# Altium PCB CC_SoC Debugger Ver1.02.PcbDoc (part 2 of 2)
Units mil, origin at the board's own origin, x right, y up, seen from the top; angles counter-clockwise.
Board outline 3750.19 x 1742.31 mil, 3 copper layers (TopLayer, MidLayer24, BottomLayer); 42 components, 43 nets, 177 pads, 79 vias.
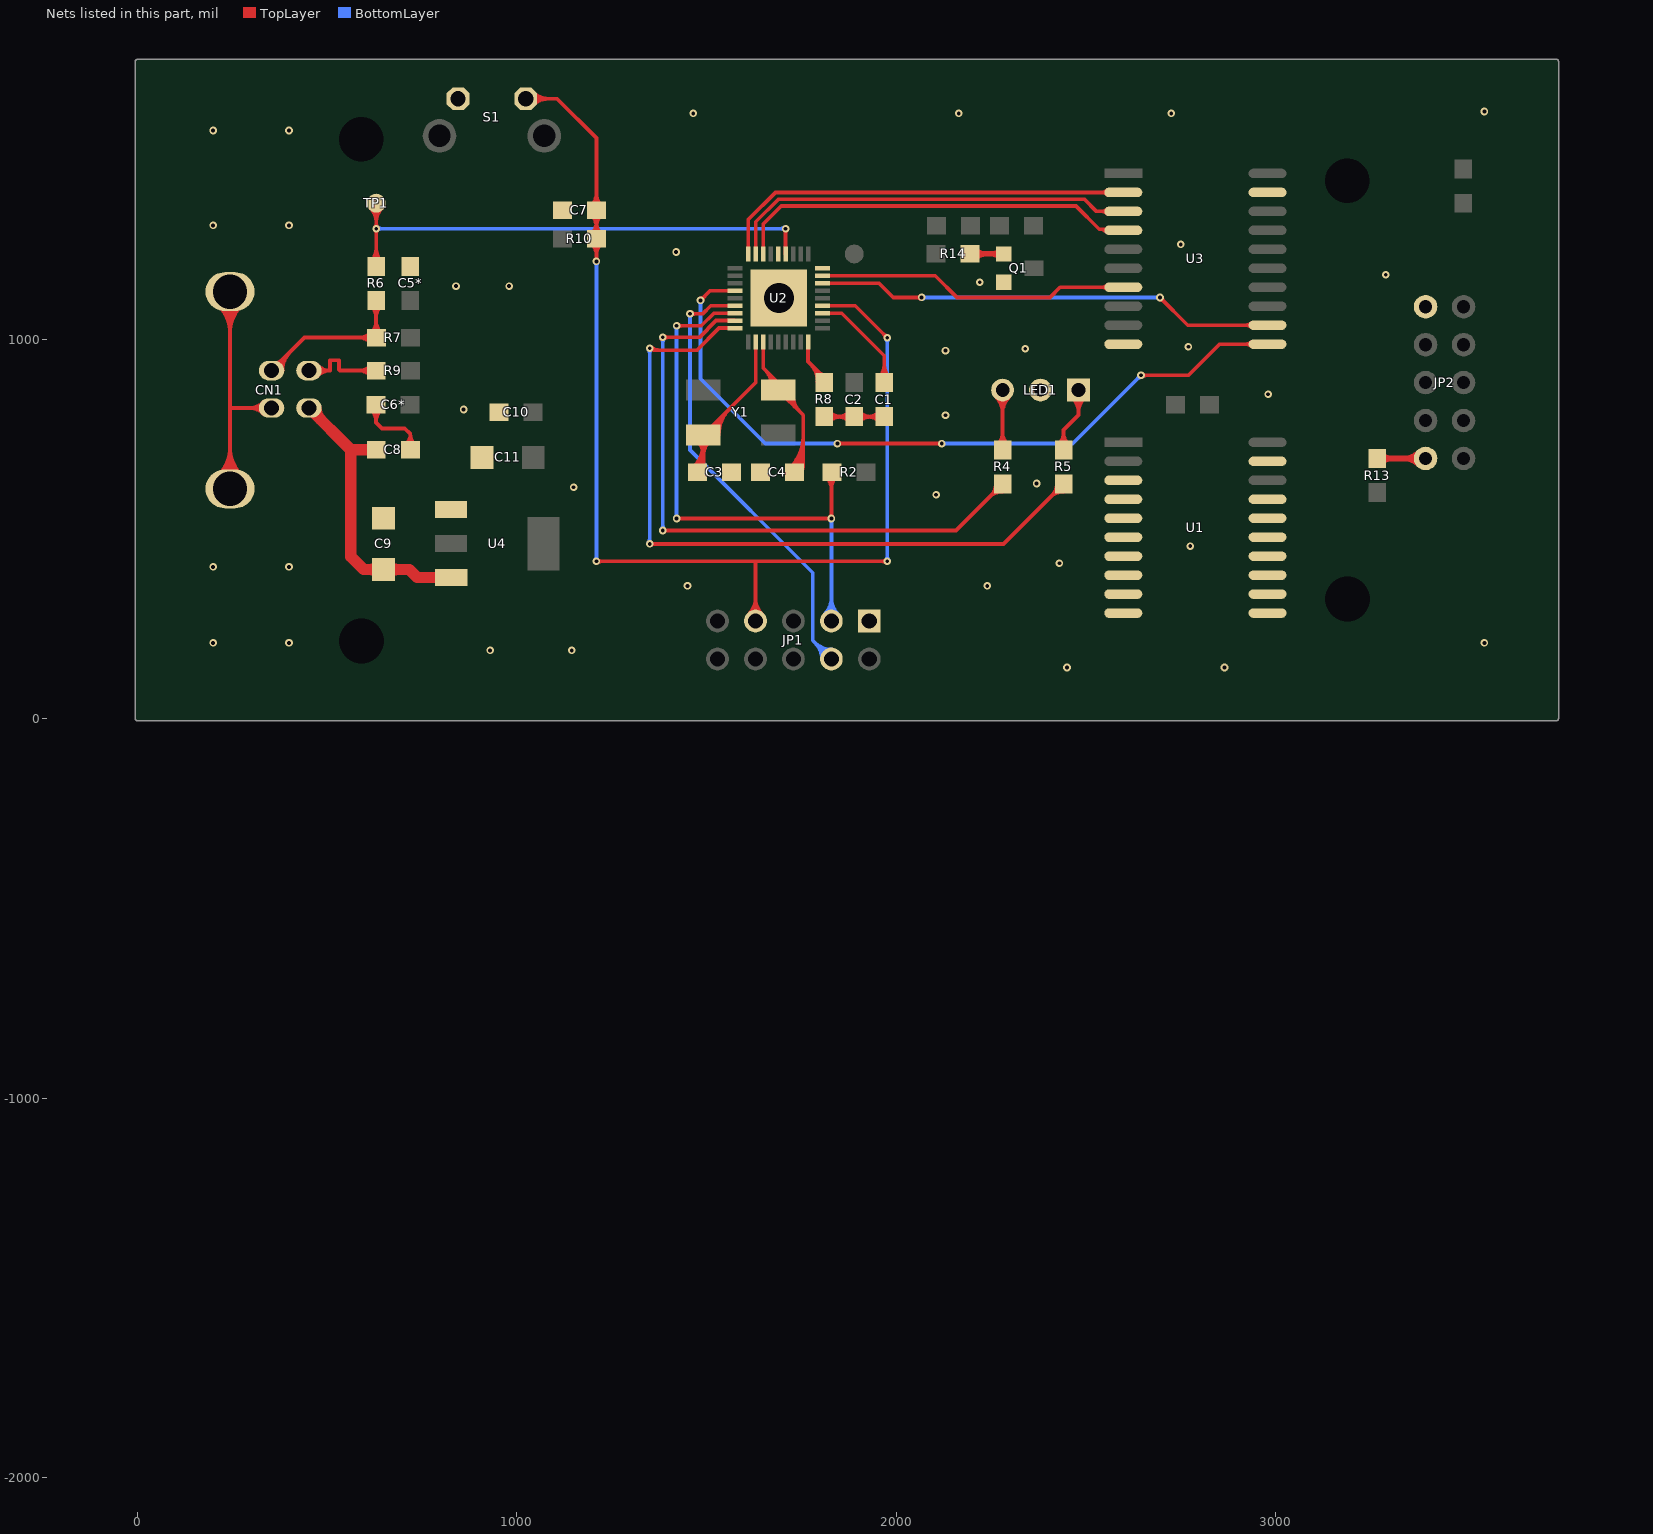
[diagram p2: the nets of this part, all layers, seen from the top]

## Via types
v1: diameter 20, hole 10, TopLayer to BottomLayer, 79 vias

## Nets (pads, with @x,y where several pads share a name; then routed paths per layer and width w, separated by ;. In a path a pad name is that pad's centre, name@x,y a point inside that pad or via, vN(x,y) a via of type N, cw(c..) or ccw(c..) an arc to the next point about the centre after c; other vN are vias at no path point) (continued)
GND: C1.2 C2.2 C3.2 C4.2 C5*.2 C6*.2 C7.2 C8.2 C9.2 C10.2 C11.2 CN1.SH1 CN1.SH2 CN1.VSS JP1.1 JP2.1 LED1.2 Q1.2 R8.1 S1.2 U1.3 U1.4 U1.5 U1.6 U1.7 U1.8 U1.9 U1.10 U1.11 U1.12 U1.13 U1.14 U1.15 U1.16 U1.17 U1.19 U2.37 U3.10 U3.19 U4.1 | length 5801.1
  TopLayer w10: CN1.SH2@244.63,605.85 244.63,822.83 ; CN1.SH1@244.63,1125.54 244.63,822.83 ; CN1.VSS@354.1,818.89 248.57,818.89 244.63,822.83 ; C6*.2@629.53,826.77 629.53,780.47 645,765 705,765 719.76,750.24 ; C8.2@719.76,708.66 719.76,750.24 ; R8.1@1811.02,796.38 1811.42,795.98 C2.2@1889.76,795.98 C1.2@1968.5,795.98 ; CN1.SH2@211.97,638.51 ccw(c133.14,717.34) 244.63,717.34 ; CN1.SH2@211.97,638.51 ccw(c133.14,717.34) 244.63,717.34 ; CN1.SH2@211.97,638.51 ccw(c133.14,717.34) 244.63,717.34 ; CN1.SH2@211.97,638.51 ccw(c133.14,717.34) 244.63,717.34 ; CN1.SH1@211.97,1092.88 cw(c133.14,1014.05) 244.63,1014.05 ; CN1.SH1@211.97,1092.88 cw(c133.14,1014.05) 244.63,1014.05 ; CN1.SH1@211.97,1092.88 cw(c133.14,1014.05) 244.63,1014.05 ; CN1.SH1@211.97,1092.88 cw(c133.14,1014.05) 244.63,1014.05 ; CN1.SH2@219.04,631.44 ccw(c157.28,693.2) 244.63,693.2 ; CN1.SH2@219.04,631.44 ccw(c157.28,693.2) 244.63,693.2 ; CN1.SH2@219.04,631.44 ccw(c157.28,693.2) 244.63,693.2 ; CN1.SH2@219.04,631.44 ccw(c157.28,693.2) 244.63,693.2 ; CN1.SH1@219.04,1099.95 cw(c157.28,1038.19) 244.63,1038.19 ; CN1.SH1@219.04,1099.95 cw(c157.28,1038.19) 244.63,1038.19 ; CN1.SH1@219.04,1099.95 cw(c157.28,1038.19) 244.63,1038.19 ; CN1.SH1@219.04,1099.95 cw(c157.28,1038.19) 244.63,1038.19 ; CN1.SH2@226.11,624.37 ccw(c181.42,669.06) 244.63,669.06 ; CN1.SH2@226.11,624.37 ccw(c181.42,669.06) 244.63,669.06 ; CN1.SH2@226.11,624.37 ccw(c181.42,669.06) 244.63,669.06 ; CN1.SH2@226.11,624.37 ccw(c181.42,669.06) 244.63,669.06 ; CN1.SH1@226.11,1107.02 cw(c181.42,1062.33) 244.63,1062.33 ; CN1.SH1@226.11,1107.02 cw(c181.42,1062.33) 244.63,1062.33 ; CN1.SH1@226.11,1107.02 cw(c181.42,1062.33) 244.63,1062.33 ; CN1.SH1@226.11,1107.02 cw(c181.42,1062.33) 244.63,1062.33 ; 244.63,669.06 ccw(c307.83,669.06) CN1.SH2@263.14,624.37 ; 244.63,669.06 ccw(c307.83,669.06) CN1.SH2@263.14,624.37 ; 244.63,669.06 ccw(c307.83,669.06) CN1.SH2@263.14,624.37 ; 244.63,669.06 ccw(c307.83,669.06) CN1.SH2@263.14,624.37 ; 244.63,693.2 ccw(c331.97,693.2) CN1.SH2@270.21,631.44 ; 244.63,693.2 ccw(c331.97,693.2) CN1.SH2@270.21,631.44 ; 244.63,693.2 ccw(c331.97,693.2) CN1.SH2@270.21,631.44 ; 244.63,693.2 ccw(c331.97,693.2) CN1.SH2@270.21,631.44 ; 244.63,717.34 ccw(c356.12,717.34) CN1.SH2@277.28,638.51 ; 244.63,717.34 ccw(c356.12,717.34) CN1.SH2@277.28,638.51 ; 244.63,717.34 ccw(c356.12,717.34) CN1.SH2@277.28,638.51 ; 244.63,717.34 ccw(c356.12,717.34) CN1.SH2@277.28,638.51 ; 244.63,1014.05 cw(c356.12,1014.05) CN1.SH1@277.28,1092.88 ; 244.63,1014.05 cw(c356.12,1014.05) CN1.SH1@277.28,1092.88 ; 244.63,1014.05 cw(c356.12,1014.05) CN1.SH1@277.28,1092.88 ; 244.63,1014.05 cw(c356.12,1014.05) CN1.SH1@277.28,1092.88 ; 244.63,1038.19 cw(c331.97,1038.19) CN1.SH1@270.21,1099.95 ; 244.63,1038.19 cw(c331.97,1038.19) CN1.SH1@270.21,1099.95 ; 244.63,1038.19 cw(c331.97,1038.19) CN1.SH1@270.21,1099.95 ; 244.63,1038.19 cw(c331.97,1038.19) CN1.SH1@270.21,1099.95 ; 244.63,1062.33 cw(c307.83,1062.33) CN1.SH1@263.14,1107.02 ; 244.63,1062.33 cw(c307.83,1062.33) CN1.SH1@263.14,1107.02 ; 244.63,1062.33 cw(c307.83,1062.33) CN1.SH1@263.14,1107.02 ; 244.63,1062.33 cw(c307.83,1062.33) CN1.SH1@263.14,1107.02 ; 296.52,818.89 cw(c296.52,769.18) CN1.VSS@331.67,804.33 ; 296.52,818.89 ccw(c296.52,868.6) CN1.VSS@331.67,833.45 ; 296.52,818.89 cw(c296.52,769.18) CN1.VSS@331.67,804.33 ; 296.52,818.89 ccw(c296.52,868.6) CN1.VSS@331.67,833.45 ; 296.52,818.89 cw(c296.52,769.18) CN1.VSS@331.67,804.33 ; 296.52,818.89 ccw(c296.52,868.6) CN1.VSS@331.67,833.45 ; 296.52,818.89 cw(c296.52,769.18) CN1.VSS@331.67,804.33 ; 296.52,818.89 ccw(c296.52,868.6) CN1.VSS@331.67,833.45 ; C6*.2@616.78,814.02 cw(c586,783.24) 629.53,783.24 ; C6*.2@616.78,814.02 cw(c586,783.24) 629.53,783.24 ; C6*.2@616.78,814.02 cw(c586,783.24) 629.53,783.24 ; 629.53,783.24 cw(c673.06,783.24) C6*.2@642.28,814.02 ; 629.53,783.24 cw(c673.06,783.24) C6*.2@642.28,814.02 ; 629.53,783.24 cw(c673.06,783.24) C6*.2@642.28,814.02 ; C8.2@707.44,721.83 ccw(c680.86,750.23) 719.76,750.23 ; C8.2@707.44,721.83 ccw(c680.86,750.23) 719.76,750.23 ; C8.2@707.44,721.83 ccw(c680.86,750.23) 719.76,750.23 ; 719.76,750.23 ccw(c758.67,750.23) C8.2@732.09,721.83 ; 719.76,750.23 ccw(c758.67,750.23) C8.2@732.09,721.83 ; 719.76,750.23 ccw(c758.67,750.23) C8.2@732.09,721.83 ; R8.1@1823.77,783.63 cw(c1853.6,753.8) 1853.6,795.98 ; R8.1@1823.77,783.63 cw(c1853.6,753.8) 1853.6,795.98 ; R8.1@1823.77,783.63 cw(c1853.6,753.8) 1853.6,795.98 ; R8.1@1823.77,809.13 ccw(c1855.51,840.86) 1855.51,795.98 ; R8.1@1823.77,809.13 ccw(c1855.51,840.86) 1855.51,795.98 ; R8.1@1823.77,809.13 ccw(c1855.51,840.86) 1855.51,795.98 ; 1846.23,795.98 cw(c1846.23,752.45) C2.2@1877.01,783.23 ; 1846.23,795.98 ccw(c1846.23,839.52) C2.2@1877.01,808.73 ; 1846.23,795.98 cw(c1846.23,752.45) C2.2@1877.01,783.23 ; 1846.23,795.98 ccw(c1846.23,839.52) C2.2@1877.01,808.73 ; 1846.23,795.98 cw(c1846.23,752.45) C2.2@1877.01,783.23 ; 1846.23,795.98 ccw(c1846.23,839.52) C2.2@1877.01,808.73 ; C2.2@1902.51,783.23 cw(c1933.3,752.45) 1933.3,795.98 ; C2.2@1902.51,783.23 cw(c1933.3,752.45) 1933.3,795.98 ; C2.2@1902.51,783.23 cw(c1933.3,752.45) 1933.3,795.98 ; C2.2@1902.51,808.73 ccw(c1933.29,839.51) 1933.29,795.98 ; C2.2@1902.51,808.73 ccw(c1933.29,839.51) 1933.29,795.98 ; C2.2@1902.51,808.73 ccw(c1933.29,839.51) 1933.29,795.98 ; 1924.97,795.98 cw(c1924.97,752.45) C1.2@1955.75,783.23 ; 1924.97,795.98 ccw(c1924.97,839.52) C1.2@1955.75,808.73 ; 1924.97,795.98 cw(c1924.97,752.45) C1.2@1955.75,783.23 ; 1924.97,795.98 ccw(c1924.97,839.52) C1.2@1955.75,808.73 ; 1924.97,795.98 cw(c1924.97,752.45) C1.2@1955.75,783.23 ; 1924.97,795.98 ccw(c1924.97,839.52) C1.2@1955.75,808.73
  other v1: 2450,135 2865,135 930,180 1145,180 200,200 400,200 3550,200 1450,350 2240,350 200,400 400,400 2430,410 2775,455 2105,590 1150,610 2370,620 2130,800 860,815 2980,855 2130,970 2340,975 2770,980 840,1140 980,1140 2220,1150 3290,1170 1420,1230 2750,1250 200,1300 400,1300 200,1550 400,1550 1465,1595 2165,1595 2725,1595 3550,1600
LED_GREEN: R5.2 U2.18 | length 2357.4
  TopLayer w10: v1(1350.39,460.63) 2282.76,460.63 R5.2@2440.94,618.82 ; 1360.76,971 1474.94,971 1533.27,1029.33 U2.18@1574.72,1029.33 ; v1@1353.93,457.09 cw(c1362.46,448.56) 1362.46,460.63 ; v1@1353.93,457.09 cw(c1362.46,448.56) 1362.46,460.63 ; v1@1353.93,457.09 cw(c1362.46,448.56) 1362.46,460.63 ; v1@1353.93,464.17 ccw(c1362.46,472.7) 1362.46,460.63 ; v1@1353.93,464.17 ccw(c1362.46,472.7) 1362.46,460.63 ; v1@1353.93,464.17 ccw(c1362.46,472.7) 1362.46,460.63 ; v1@1353.93,979.91 ccw(c1375.45,1001.43) 1375.45,971 ; v1@1353.93,979.91 ccw(c1375.45,1001.43) 1375.45,971 ; v1@1353.93,979.91 ccw(c1375.45,1001.43) 1375.45,971 ; 2406.8,584.68 cw(c2440.94,550.53) R5.2@2440.94,598.82 ; 2406.8,584.68 cw(c2440.94,550.53) R5.2@2440.94,598.82 ; 2406.8,584.68 cw(c2440.94,550.53) R5.2@2440.94,598.82 ; 2411.56,589.43 ccw(c2384.13,616.85) R5.2@2422.91,616.85 ; 2411.56,589.43 ccw(c2384.13,616.85) R5.2@2422.91,616.85 ; 2411.56,589.43 ccw(c2384.13,616.85) R5.2@2422.91,616.85
  BottomLayer w10: v1(1350.39,460.63) v1(1350.39,976.38) ; v1@1346.86,464.17 ccw(c1338.32,472.7) 1350.39,472.7 ; v1@1346.86,464.17 ccw(c1338.32,472.7) 1350.39,472.7 ; v1@1346.86,464.17 ccw(c1338.32,472.7) 1350.39,472.7 ; v1@1346.86,972.84 cw(c1338.32,964.31) 1350.39,964.31 ; v1@1346.86,972.84 cw(c1338.32,964.31) 1350.39,964.31 ; v1@1346.86,972.84 cw(c1338.32,964.31) 1350.39,964.31 ; 1350.39,472.7 ccw(c1362.46,472.7) v1@1353.93,464.17 ; 1350.39,472.7 ccw(c1362.46,472.7) v1@1353.93,464.17 ; 1350.39,472.7 ccw(c1362.46,472.7) v1@1353.93,464.17 ; 1350.39,964.31 cw(c1362.46,964.31) v1@1353.93,972.84 ; 1350.39,964.31 cw(c1362.46,964.31) v1@1353.93,972.84 ; 1350.39,964.31 cw(c1362.46,964.31) v1@1353.93,972.84
LED_RED: R4.2 U2.17 | length 1968.2
  TopLayer w10: v1@1381.89,1000 v1@1385,1000 ; v1(1385,496.06) 2157.56,496.06 R4.2@2280.32,618.82 ; v1(1385,1005) 1481.38,1005 1525.39,1049.02 U2.17@1574.72,1049.02 ; 2246.17,584.68 cw(c2280.32,550.53) R4.2@2280.32,598.82 ; 2250.93,589.43 ccw(c2223.5,616.85) R4.2@2262.28,616.85 ; R4.2@2281.89,617.24 R4.2@2283.46,618.82 ; v1@1388.54,492.53 cw(c1397.07,483.99) 1397.07,496.06 ; v1@1388.54,492.53 cw(c1397.07,483.99) 1397.07,496.06 ; v1@1388.54,492.53 cw(c1397.07,483.99) 1397.07,496.06 ; v1@1388.54,499.6 ccw(c1397.07,508.13) 1397.07,496.06 ; v1@1388.54,499.6 ccw(c1397.07,508.13) 1397.07,496.06 ; v1@1388.54,499.6 ccw(c1397.07,508.13) 1397.07,496.06 ; v1@1388.54,1001.46 cw(c1397.07,992.93) 1397.07,1005 ; v1@1388.54,1001.46 cw(c1397.07,992.93) 1397.07,1005 ; v1@1388.54,1001.46 cw(c1397.07,992.93) 1397.07,1005 ; v1@1388.54,1008.54 ccw(c1397.07,1017.07) 1397.07,1005 ; v1@1388.54,1008.54 ccw(c1397.07,1017.07) 1397.07,1005 ; v1@1388.54,1008.54 ccw(c1397.07,1017.07) 1397.07,1005
  BottomLayer w10: v1@1385,492.13 v1(1385,496.06) v1(1385,1005) ; v1@1381.46,499.6 ccw(c1372.93,508.13) 1385,508.13 ; v1@1381.46,499.6 ccw(c1372.93,508.13) 1385,508.13 ; v1@1381.46,499.6 ccw(c1372.93,508.13) 1385,508.13 ; v1@1381.46,1001.46 cw(c1372.93,992.93) 1385,992.93 ; v1@1381.46,1001.46 cw(c1372.93,992.93) 1385,992.93 ; v1@1381.46,1001.46 cw(c1372.93,992.93) 1385,992.93 ; 1385,508.13 ccw(c1397.07,508.13) v1@1388.54,499.6 ; 1385,508.13 ccw(c1397.07,508.13) v1@1388.54,499.6 ; 1385,508.13 ccw(c1397.07,508.13) v1@1388.54,499.6 ; 1385,992.93 cw(c1397.07,992.93) v1@1388.54,1001.46 ; 1385,992.93 cw(c1397.07,992.93) v1@1388.54,1001.46 ; 1385,992.93 cw(c1397.07,992.93) v1@1388.54,1001.46
NetC1_1: C1.1 U2.30 | length 485.1
  TopLayer w10: U2.30@1805.72,1068.7 1856.3,1068.7 1968.5,956.5 C1.1@1968.5,885.83 ; C1.1@1955.75,900.55 ccw(c1924.97,931.33) 1968.5,931.33 ; C1.1@1955.75,900.55 ccw(c1924.97,931.33) 1968.5,931.33 ; C1.1@1955.75,900.55 ccw(c1924.97,931.33) 1968.5,931.33 ; 1968.5,931.33 ccw(c2012.04,931.33) C1.1@1981.25,900.55 ; 1968.5,931.33 ccw(c2012.04,931.33) C1.1@1981.25,900.55 ; 1968.5,931.33 ccw(c2012.04,931.33) C1.1@1981.25,900.55
NetC3_1: C3.1 U2.20 Y1.1 | length 1793
  TopLayer w10: C3.1@1476.38,653.54 C3.1@1476.38,649.61 1492,665.23 Y1.1@1492,748.03 1629.92,885.95 U2.20@1629.92,992.33 ; C3.1@1465.6,662.36 ccw(c1401.85,726.1) Y1.1@1492,726.1 ; C3.1@1465.6,662.36 ccw(c1401.85,726.1) Y1.1@1492,726.1 ; C3.1@1465.6,662.36 ccw(c1401.85,726.1) Y1.1@1492,726.1 ; C3.1@1472.67,655.29 ccw(c1425.99,701.96) 1492,701.96 ; C3.1@1472.67,655.29 ccw(c1425.99,701.96) 1492,701.96 ; C3.1@1472.67,655.29 ccw(c1425.99,701.96) 1492,701.96 ; Y1.1@1476.05,732.08 cw(c1437.54,693.57) 1492,693.57 ; Y1.1@1476.05,732.08 cw(c1437.54,693.57) 1492,693.57 ; Y1.1@1476.05,732.08 cw(c1437.54,693.57) 1492,693.57 ; C3.1@1479.74,648.21 ccw(c1450.14,677.82) 1492,677.82 ; C3.1@1479.74,648.21 ccw(c1450.14,677.82) 1492,677.82 ; C3.1@1479.74,648.21 ccw(c1450.14,677.82) 1492,677.82 ; Y1.1@1483.12,739.15 cw(c1461.68,717.71) 1492,717.71 ; Y1.1@1483.12,739.15 cw(c1461.68,717.71) 1492,717.71 ; Y1.1@1483.12,739.15 cw(c1461.68,717.71) 1492,717.71 ; 1492,693.57 cw(c1546.46,693.57) Y1.1@1507.95,732.08 ; 1492,693.57 cw(c1546.46,693.57) Y1.1@1507.95,732.08 ; 1492,693.57 cw(c1546.46,693.57) Y1.1@1507.95,732.08 ; 1492,717.71 cw(c1522.32,717.71) Y1.1@1500.88,739.15 ; 1492,717.71 cw(c1522.32,717.71) Y1.1@1500.88,739.15 ; 1492,717.71 cw(c1522.32,717.71) Y1.1@1500.88,739.15 ; Y1.1@1512.28,748.03 cw(c1561.22,748.03) 1526.61,782.64 ; Y1.1@1512.28,748.03 cw(c1561.22,748.03) 1526.61,782.64 ; Y1.1@1512.28,748.03 cw(c1561.22,748.03) 1526.61,782.64 ; Y1.1@1522.28,748.03 cw(c1595.37,748.03) 1543.68,799.71 ; Y1.1@1522.28,748.03 cw(c1595.37,748.03) 1543.68,799.71 ; Y1.1@1522.28,748.03 cw(c1595.37,748.03) 1543.68,799.71 ; Y1.1@1532.28,748.03 cw(c1629.51,748.03) 1560.75,816.79 ; Y1.1@1532.28,748.03 cw(c1629.51,748.03) 1560.75,816.79 ; Y1.1@1532.28,748.03 cw(c1629.51,748.03) 1560.75,816.79
NetC4_1: C4.1 U2.21 Y1.3 | length 1815.5
  TopLayer w10: U2.21@1649.61,992.33 1649.61,924.24 1688.85,885 Y1.3@1688.85,866.14 1755,799.99 1755,672.32 C4.1@1732.28,649.61 ; Y1.3@1709.09,865.73 ccw(c1742.38,860.31) 1718.53,836.46 ; Y1.3@1709.09,865.73 ccw(c1742.38,860.31) 1718.53,836.46 ; Y1.3@1709.09,865.73 ccw(c1742.38,860.31) 1718.53,836.46 ; Y1.3@1718.96,864.12 ccw(c1766.12,856.44) 1732.34,822.66 ; Y1.3@1718.96,864.12 ccw(c1766.12,856.44) 1732.34,822.66 ; Y1.3@1718.96,864.12 ccw(c1766.12,856.44) 1732.34,822.66 ; C4.1@1721.5,662.36 ccw(c1640.63,743.23) 1755,743.23 ; C4.1@1721.5,662.36 ccw(c1640.63,743.23) 1755,743.23 ; C4.1@1721.5,662.36 ccw(c1640.63,743.23) 1755,743.23 ; C4.1@1728.57,655.29 ccw(c1664.77,719.09) 1755,719.09 ; C4.1@1728.57,655.29 ccw(c1664.77,719.09) 1755,719.09 ; C4.1@1728.57,655.29 ccw(c1664.77,719.09) 1755,719.09 ; Y1.3@1728.83,862.52 ccw(c1789.87,852.58) 1746.14,808.85 ; Y1.3@1728.83,862.52 ccw(c1789.87,852.58) 1746.14,808.85 ; Y1.3@1728.83,862.52 ccw(c1789.87,852.58) 1746.14,808.85 ; C4.1@1735.64,648.21 ccw(c1688.91,694.94) 1755,694.94 ; C4.1@1735.64,648.21 ccw(c1688.91,694.94) 1755,694.94 ; C4.1@1735.64,648.21 ccw(c1688.91,694.94) 1755,694.94 ; C4.1@1742.72,641.14 ccw(c1713.06,670.8) C4.1@1755,670.8 ; C4.1@1742.72,641.14 ccw(c1713.06,670.8) C4.1@1755,670.8 ; C4.1@1742.72,641.14 ccw(c1713.06,670.8) C4.1@1755,670.8 ; 1655.32,918.53 cw(c1618.15,881.36) 1668.67,866.85 ccw(c1618.15,881.36) 1655.32,918.53 ; 1667.32,906.53 cw(c1636.79,876) 1678.29,864.09 ccw(c1636.79,876) 1667.32,906.53 ; 1679.32,894.53 cw(c1655.43,870.65) 1687.9,861.33 ccw(c1655.43,870.65) 1679.32,894.53
NetCN1_D+: CN1.D+ R6.1 R7.1 | length 1546.5
  TopLayer w10: CN1.D+@354.1,917.32 441.04,1004.25 R7.1@630.01,1004.25 629.61,1004.65 R6.1@629.61,1102.45 ; CN1.D+@361.98,937.91 ccw(c361.98,968.61) 383.69,946.9 ; CN1.D+@361.98,937.91 ccw(c361.98,968.61) 383.69,946.9 ; CN1.D+@361.98,937.91 ccw(c361.98,968.61) 383.69,946.9 ; CN1.D+@361.98,937.91 ccw(c361.98,968.61) 383.69,946.9 ; CN1.D+@372.57,917.32 cw(c417.14,917.32) 385.62,948.84 ; CN1.D+@372.57,917.32 cw(c417.14,917.32) 385.62,948.84 ; CN1.D+@372.57,917.32 cw(c417.14,917.32) 385.62,948.84 ; CN1.D+@372.57,917.32 cw(c417.14,917.32) 385.62,948.84 ; CN1.D+@382.57,917.32 cw(c451.29,917.32) 402.69,965.91 ; CN1.D+@382.57,917.32 cw(c451.29,917.32) 402.69,965.91 ; CN1.D+@382.57,917.32 cw(c451.29,917.32) 402.69,965.91 ; CN1.D+@382.57,917.32 cw(c451.29,917.32) 402.69,965.91 ; 584.51,1004.25 cw(c584.51,960.72) R7.1@615.29,991.5 ; 584.51,1004.25 ccw(c584.51,1047.78) R7.1@615.29,1017 ; 584.51,1004.25 cw(c584.51,960.72) R7.1@615.29,991.5 ; 584.51,1004.25 ccw(c584.51,1047.78) R7.1@615.29,1017 ; 584.51,1004.25 cw(c584.51,960.72) R7.1@615.29,991.5 ; 584.51,1004.25 ccw(c584.51,1047.78) R7.1@615.29,1017 ; 584.51,1004.25 cw(c584.51,960.72) R7.1@615.29,991.5 ; 584.51,1004.25 ccw(c584.51,1047.78) R7.1@615.29,1017 ; R6.1@616.86,1087.73 cw(c586.07,1056.95) 629.61,1056.95 ; R6.1@616.86,1087.73 cw(c586.07,1056.95) 629.61,1056.95 ; R6.1@616.86,1087.73 cw(c586.07,1056.95) 629.61,1056.95 ; R7.1@617.26,1017 ccw(c587.45,1046.81) 629.61,1046.81 ; R7.1@617.26,1017 ccw(c587.45,1046.81) 629.61,1046.81 ; R7.1@617.26,1017 ccw(c587.45,1046.81) 629.61,1046.81 ; 629.61,1048.75 ccw(c674.51,1048.75) R7.1@642.76,1017 ; 629.61,1048.75 ccw(c674.51,1048.75) R7.1@642.76,1017 ; 629.61,1048.75 ccw(c674.51,1048.75) R7.1@642.76,1017 ; 629.61,1056.95 cw(c673.14,1056.95) R6.1@642.36,1087.73 ; 629.61,1056.95 cw(c673.14,1056.95) R6.1@642.36,1087.73 ; 629.61,1056.95 cw(c673.14,1056.95) R6.1@642.36,1087.73
NetCN1_D-: CN1.D- R9.1 | length 726.9
  TopLayer w10: CN1.D-@452.53,917.31 507.87,917.31 ; 507.87,917.32 507.87,944.88 531.5,944.88 531.5,920 534.18,917.31 R9.1@629.92,917.31 ; CN1.D-@475.44,903.25 cw(c507.86,872.91) 507.86,917.31 ; CN1.D-@475.44,903.25 cw(c507.86,872.91) 507.86,917.31 ; CN1.D-@475.44,903.25 cw(c507.86,872.91) 507.86,917.31 ; CN1.D-@475.44,903.25 cw(c507.86,872.91) 507.86,917.31 ; CN1.D-@475.44,931.38 ccw(c507.86,961.72) 507.86,917.31 ; CN1.D-@475.44,931.38 ccw(c507.86,961.72) 507.86,917.31 ; CN1.D-@475.44,931.38 ccw(c507.86,961.72) 507.86,917.31 ; CN1.D-@475.44,931.38 ccw(c507.86,961.72) 507.86,917.31 ; 584.42,917.31 cw(c584.42,873.78) R9.1@615.2,904.56 ; 584.42,917.31 ccw(c584.42,960.85) R9.1@615.2,930.06 ; 584.42,917.31 cw(c584.42,873.78) R9.1@615.2,904.56 ; 584.42,917.31 ccw(c584.42,960.85) R9.1@615.2,930.06 ; 584.42,917.31 cw(c584.42,873.78) R9.1@615.2,904.56 ; 584.42,917.31 ccw(c584.42,960.85) R9.1@615.2,930.06
NetJP1_3: JP1.3 R2.1 U2.16 | length 2534.8
  TopLayer w10: v1(1421.26,527.56) v1(1829.13,527.56) 1829.13,648.03 R2.1@1830.71,649.61 ; v1(1421.26,1035.43) 1486.36,1035.43 1519.62,1068.7 U2.16@1574.72,1068.7 ; v1@1424.8,524.02 cw(c1433.33,515.49) 1433.33,527.56 ; v1@1424.8,524.02 cw(c1433.33,515.49) 1433.33,527.56 ; v1@1424.8,524.02 cw(c1433.33,515.49) 1433.33,527.56 ; v1@1424.8,531.09 ccw(c1433.33,539.63) 1433.33,527.56 ; v1@1424.8,531.09 ccw(c1433.33,539.63) 1433.33,527.56 ; v1@1424.8,531.09 ccw(c1433.33,539.63) 1433.33,527.56 ; v1@1424.8,1031.9 cw(c1433.33,1023.36) 1433.33,1035.43 ; v1@1424.8,1031.9 cw(c1433.33,1023.36) 1433.33,1035.43 ; v1@1424.8,1031.9 cw(c1433.33,1023.36) 1433.33,1035.43 ; v1@1424.8,1038.97 ccw(c1433.33,1047.5) 1433.33,1035.43 ; v1@1424.8,1038.97 ccw(c1433.33,1047.5) 1433.33,1035.43 ; v1@1424.8,1038.97 ccw(c1433.33,1047.5) 1433.33,1035.43 ; R2.1@1815.99,636.86 cw(c1784.26,605.12) 1829.13,605.12 ; R2.1@1815.99,636.86 cw(c1784.26,605.12) 1829.13,605.12 ; R2.1@1815.99,636.86 cw(c1784.26,605.12) 1829.13,605.12 ; 1817.06,527.56 cw(c1817.06,515.49) v1@1825.6,524.02 ; 1817.06,527.56 ccw(c1817.06,539.63) v1@1825.6,531.09 ; 1817.06,527.56 cw(c1817.06,515.49) v1@1825.6,524.02 ; 1817.06,527.56 ccw(c1817.06,539.63) v1@1825.6,531.09 ; 1817.06,527.56 cw(c1817.06,515.49) v1@1825.6,524.02 ; 1817.06,527.56 ccw(c1817.06,539.63) v1@1825.6,531.09 ; v1@1825.6,531.09 ccw(c1817.06,539.63) 1829.13,539.63 ; v1@1825.6,531.09 ccw(c1817.06,539.63) 1829.13,539.63 ; v1@1825.6,531.09 ccw(c1817.06,539.63) 1829.13,539.63 ; 1829.13,539.63 ccw(c1841.2,539.63) v1@1832.67,531.09 ; 1829.13,539.63 ccw(c1841.2,539.63) v1@1832.67,531.09 ; 1829.13,539.63 ccw(c1841.2,539.63) v1@1832.67,531.09 ; 1829.13,607.02 cw(c1871.32,607.02) R2.1@1841.49,636.86 ; 1829.13,607.02 cw(c1871.32,607.02) R2.1@1841.49,636.86 ; 1829.13,607.02 cw(c1871.32,607.02) R2.1@1841.49,636.86
  BottomLayer w10: v1(1421.26,1035.43) 1421.26,529 1421.98,528.28 v1@1422.7,527.56 ; JP1.3@1829.13,257.48 v1(1829.13,527.56) ; v1@1417.72,531.09 ccw(c1409.19,539.63) 1421.26,539.63 ; v1@1417.72,531.09 ccw(c1409.19,539.63) 1421.26,539.63 ; v1@1417.72,531.09 ccw(c1409.19,539.63) 1421.26,539.63 ; v1@1417.72,1031.9 cw(c1409.19,1023.36) 1421.26,1023.36 ; v1@1417.72,1031.9 cw(c1409.19,1023.36) 1421.26,1023.36 ; v1@1417.72,1031.9 cw(c1409.19,1023.36) 1421.26,1023.36 ; 1421.26,539.63 ccw(c1433.33,539.63) v1@1424.8,531.09 ; 1421.26,539.63 ccw(c1433.33,539.63) v1@1424.8,531.09 ; 1421.26,539.63 ccw(c1433.33,539.63) v1@1424.8,531.09 ; 1421.26,1023.36 cw(c1433.33,1023.36) v1@1424.8,1031.9 ; 1421.26,1023.36 cw(c1433.33,1023.36) v1@1424.8,1031.9 ; 1421.26,1023.36 cw(c1433.33,1023.36) v1@1424.8,1031.9 ; JP1.3@1811.46,275.16 ccw(c1768.78,317.84) 1829.13,317.84 ; JP1.3@1811.46,275.16 ccw(c1768.78,317.84) 1829.13,317.84 ; JP1.3@1811.46,275.16 ccw(c1768.78,317.84) 1829.13,317.84 ; JP1.3@1818.53,268.09 ccw(c1792.92,293.69) 1829.13,293.69 ; JP1.3@1818.53,268.09 ccw(c1792.92,293.69) 1829.13,293.69 ; JP1.3@1818.53,268.09 ccw(c1792.92,293.69) 1829.13,293.69 ; v1@1825.6,524.02 cw(c1817.06,515.49) 1829.13,515.49 ; v1@1825.6,524.02 cw(c1817.06,515.49) 1829.13,515.49 ; v1@1825.6,524.02 cw(c1817.06,515.49) 1829.13,515.49 ; 1829.13,293.69 ccw(c1865.35,293.69) JP1.3@1839.74,268.09 ; 1829.13,293.69 ccw(c1865.35,293.69) JP1.3@1839.74,268.09 ; 1829.13,293.69 ccw(c1865.35,293.69) JP1.3@1839.74,268.09 ; 1829.13,317.84 ccw(c1889.49,317.84) JP1.3@1846.81,275.16 ; 1829.13,317.84 ccw(c1889.49,317.84) JP1.3@1846.81,275.16 ; 1829.13,317.84 ccw(c1889.49,317.84) JP1.3@1846.81,275.16 ; 1829.13,515.49 cw(c1841.2,515.49) v1@1832.67,524.02 ; 1829.13,515.49 cw(c1841.2,515.49) v1@1832.67,524.02 ; 1829.13,515.49 cw(c1841.2,515.49) v1@1832.67,524.02
NetJP1_4: JP1.4 U2.15 | length 1911.2
  TopLayer w10: v1(1456.69,1066.93) 1489.83,1066.93 1511.28,1088.39 U2.15@1574.72,1088.39 ; v1@1460.23,1063.39 cw(c1468.76,1054.86) 1468.76,1066.93 ; v1@1460.23,1063.39 cw(c1468.76,1054.86) 1468.76,1066.93 ; v1@1460.23,1063.39 cw(c1468.76,1054.86) 1468.76,1066.93 ; v1@1460.23,1070.46 ccw(c1468.76,1079) 1468.76,1066.93 ; v1@1460.23,1070.46 ccw(c1468.76,1079) 1468.76,1066.93 ; v1@1460.23,1070.46 ccw(c1468.76,1079) 1468.76,1066.93
  BottomLayer w10: v1(1456.69,1066.93) 1456.69,708.07 1780,384.76 1780,206.61 JP1.4@1829.13,157.48 ; v1@1453.16,1063.39 cw(c1444.62,1054.86) 1456.69,1054.86 ; v1@1453.16,1063.39 cw(c1444.62,1054.86) 1456.69,1054.86 ; v1@1453.16,1063.39 cw(c1444.62,1054.86) 1456.69,1054.86 ; 1456.69,1054.86 cw(c1468.76,1054.86) v1@1460.23,1063.39 ; 1456.69,1054.86 cw(c1468.76,1054.86) v1@1460.23,1063.39 ; 1456.69,1054.86 cw(c1468.76,1054.86) v1@1460.23,1063.39 ; 1786.46,200.16 cw(c1743.78,157.48) JP1.4@1804.13,157.48 ; 1786.46,200.16 ccw(c1829.13,242.84) JP1.4@1829.13,182.48 ; 1786.46,200.16 cw(c1743.78,157.48) JP1.4@1804.13,157.48 ; 1786.46,200.16 ccw(c1829.13,242.84) JP1.4@1829.13,182.48 ; 1786.46,200.16 cw(c1743.78,157.48) JP1.4@1804.13,157.48 ; 1786.46,200.16 ccw(c1829.13,242.84) JP1.4@1829.13,182.48 ; 1786.46,200.16 cw(c1743.78,157.48) JP1.4@1804.13,157.48 ; 1786.46,200.16 ccw(c1829.13,242.84) JP1.4@1829.13,182.48 ; 1803.53,183.09 cw(c1777.92,157.48) JP1.4@1814.13,157.48 ; 1803.53,183.09 ccw(c1829.13,208.69) JP1.4@1829.13,172.48 ; 1803.53,183.09 cw(c1777.92,157.48) JP1.4@1814.13,157.48 ; 1803.53,183.09 ccw(c1829.13,208.69) JP1.4@1829.13,172.48 ; 1803.53,183.09 cw(c1777.92,157.48) JP1.4@1814.13,157.48 ; 1803.53,183.09 ccw(c1829.13,208.69) JP1.4@1829.13,172.48 ; 1803.53,183.09 cw(c1777.92,157.48) JP1.4@1814.13,157.48 ; 1803.53,183.09 ccw(c1829.13,208.69) JP1.4@1829.13,172.48
NetJP2_9: JP2.9 R13.2 | length 571.2
  TopLayer w15: R13.2@3267.72,685.84 JP2.9@3394.88,685.83 ; R13.2@3278.7,674.86 cw(c3305.21,648.35) 3305.21,685.84 ; R13.2@3278.7,674.86 cw(c3305.21,648.35) 3305.21,685.84 ; R13.2@3278.7,674.86 cw(c3305.21,648.35) 3305.21,685.84 ; R13.2@3278.7,696.83 ccw(c3305.21,723.34) 3305.21,685.84 ; R13.2@3278.7,696.83 ccw(c3305.21,723.34) 3305.21,685.84 ; R13.2@3278.7,696.83 ccw(c3305.21,723.34) 3305.21,685.84 ; 3338.11,685.84 cw(c3338.11,629.05) JP2.9@3378.26,669.21 ; 3338.11,685.84 cw(c3338.11,629.05) JP2.9@3378.26,669.21 ; 3338.11,685.84 cw(c3338.11,629.05) JP2.9@3378.26,669.21 ; 3338.19,685.84 ccw(c3338.19,742.52) JP2.9@3378.26,702.44 ; 3338.19,685.84 ccw(c3338.19,742.52) JP2.9@3378.26,702.44 ; 3338.19,685.84 ccw(c3338.19,742.52) JP2.9@3378.26,702.44
NetLED1_1: LED1.1 R5.1 | length 393.9
  TopLayer w10: R5.1@2428.19,723.38 ccw(c2397.41,754.16) 2440.94,754.16 ccw(c2484.48,754.16) R5.1@2453.7,723.38 ; R5.1@2440.94,708.66 2440.94,760.94 2480.32,800.31 LED1.1@2480.32,866.14 ; LED1.1@2462.64,848.46 cw(c2419.96,805.79) 2480.32,805.79 cw(c2540.67,805.79) LED1.1@2497.99,848.46 ; LED1.1@2469.71,855.54 cw(c2444.1,829.93) 2480.32,829.93 cw(c2516.53,829.93) LED1.1@2490.92,855.54
NetLED1_3: LED1.3 R4.1 | length 377.5
  TopLayer w10: LED1.3@2262.64,848.46 cw(c2219.96,805.79) 2280.32,805.79 cw(c2340.67,805.79) LED1.3@2297.99,848.46 ; R4.1@2267.56,723.38 ccw(c2236.78,754.16) 2280.32,754.16 ccw(c2323.85,754.16) R4.1@2293.07,723.38 ; LED1.3@2269.71,855.54 cw(c2244.1,829.93) 2280.32,829.93 cw(c2316.53,829.93) LED1.3@2290.92,855.54 ; R4.1@2280.32,708.66 LED1.3@2280.32,866.14
NetQ1_1: Q1.1 R14.2 | length 407.5
  TopLayer w15: R14.2@2194.84,1225 Q1.1@2283.46,1225 ; R14.2@2207.79,1214.02 cw(c2234.31,1187.5) 2234.31,1225 ; R14.2@2207.79,1214.02 cw(c2234.31,1187.5) 2234.31,1225 ; R14.2@2207.79,1214.02 cw(c2234.31,1187.5) 2234.31,1225 ; R14.2@2207.79,1235.98 ccw(c2234.31,1262.5) 2234.31,1225 ; R14.2@2207.79,1235.98 ccw(c2234.31,1262.5) 2234.31,1225 ; R14.2@2207.79,1235.98 ccw(c2234.31,1262.5) 2234.31,1225 ; 2253.29,1225 cw(c2253.29,1194.82) Q1.1@2274.63,1216.16 ; 2253.29,1225 ccw(c2253.29,1255.18) Q1.1@2274.63,1233.84 ; 2253.29,1225 cw(c2253.29,1194.82) Q1.1@2274.63,1216.16 ; 2253.29,1225 ccw(c2253.29,1255.18) Q1.1@2274.63,1233.84 ; 2253.29,1225 cw(c2253.29,1194.82) Q1.1@2274.63,1216.16 ; 2253.29,1225 ccw(c2253.29,1255.18) Q1.1@2274.63,1233.84
NetR8_2: R8.2 U2.27 | length 428.5
  TopLayer w10: U2.27@1767.72,992.33 1767.72,940.94 1810.71,897.95 R8.2@1810.71,886.22 ; 1773.56,935.1 cw(c1726.65,888.19) R8.2@1792.99,888.19 ; 1773.56,935.1 cw(c1726.65,888.19) R8.2@1792.99,888.19 ; 1773.56,935.1 cw(c1726.65,888.19) R8.2@1792.99,888.19 ; 1790.63,918.03 cw(c1760.79,888.19) R8.2@1802.99,888.19 ; 1790.63,918.03 cw(c1760.79,888.19) R8.2@1802.99,888.19 ; 1790.63,918.03 cw(c1760.79,888.19) R8.2@1802.99,888.19 ; 1796.37,912.29 ccw(c1811.02,926.94) R8.2@1811.02,906.22 ; 1796.37,912.29 ccw(c1811.02,926.94) R8.2@1811.02,906.22 ; 1796.37,912.29 ccw(c1811.02,926.94) R8.2@1811.02,906.22
RESET_N: C7.1 JP1.7 R10.1 S1.1 U2.31 | length 5324.5
  TopLayer w10: S1.1@1023.62,1633.86 1106.14,1633.86 1210,1530 C7.1@1210,1340 R10.1@1210,1265 v1(1210,1205) ; v1@1210,414.76 1629.13,414.76 ; JP1.7@1629.13,257.48 1629.13,414.76 ; 1629.13,415 1629.13,414.76 ; U2.31@1805.72,1088.39 1891.93,1088.39 v1(1976.38,1003.94) ; v1@1971.38,1003.94 ccw(c1959.31,1003.94) 1967.84,1012.47 ccw(c1976.38,1021.01) v1@1976.38,1008.94 ; v1@1976.38,414.76 1629.13,414.76 ; S1.1@1034.23,1623.25 cw(c1059.84,1597.65) 1059.84,1633.86 ; S1.1@1034.23,1623.25 cw(c1059.84,1597.65) 1059.84,1633.86 ; S1.1@1034.23,1623.25 cw(c1059.84,1597.65) 1059.84,1633.86 ; S1.1@1034.23,1644.46 ccw(c1059.84,1670.07) 1059.84,1633.86 ; S1.1@1034.23,1644.46 ccw(c1059.84,1670.07) 1059.84,1633.86 ; S1.1@1034.23,1644.46 ccw(c1059.84,1670.07) 1059.84,1633.86 ; S1.1@1041.3,1616.18 cw(c1083.98,1573.5) 1083.98,1633.86 ; S1.1@1041.3,1616.18 cw(c1083.98,1573.5) 1083.98,1633.86 ; S1.1@1041.3,1616.18 cw(c1083.98,1573.5) 1083.98,1633.86 ; S1.1@1041.3,1651.54 ccw(c1083.98,1694.21) 1083.98,1633.86 ; S1.1@1041.3,1651.54 ccw(c1083.98,1694.21) 1083.98,1633.86 ; S1.1@1041.3,1651.54 ccw(c1083.98,1694.21) 1083.98,1633.86 ; R10.1@1197.25,1252.25 cw(c1166.47,1221.47) 1210,1221.47 ; R10.1@1197.25,1252.25 cw(c1166.47,1221.47) 1210,1221.47 ; R10.1@1197.25,1252.25 cw(c1166.47,1221.47) 1210,1221.47 ; R10.1@1197.25,1277.75 ccw(c1166.47,1308.53) 1210,1308.53 ; R10.1@1197.25,1277.75 ccw(c1166.47,1308.53) 1210,1308.53 ; R10.1@1197.25,1277.75 ccw(c1166.47,1308.53) 1210,1308.53 ; C7.1@1197.25,1327.25 cw(c1166.47,1296.47) 1210,1296.47 ; C7.1@1197.25,1327.25 cw(c1166.47,1296.47) 1210,1296.47 ; C7.1@1197.25,1327.25 cw(c1166.47,1296.47) 1210,1296.47 ; C7.1@1197.25,1352.75 ccw(c1166.47,1383.53) 1210,1383.53 ; C7.1@1197.25,1352.75 ccw(c1166.47,1383.53) 1210,1383.53 ; C7.1@1197.25,1352.75 ccw(c1166.47,1383.53) 1210,1383.53 ; v1@1206.46,1208.54 ccw(c1197.93,1217.07) 1210,1217.07 ; v1@1206.46,1208.54 ccw(c1197.93,1217.07) 1210,1217.07 ; v1@1206.46,1208.54 ccw(c1197.93,1217.07) 1210,1217.07 ; 1210,1217.07 ccw(c1222.07,1217.07) v1@1213.54,1208.54 ; 1210,1217.07 ccw(c1222.07,1217.07) v1@1213.54,1208.54 ; 1210,1217.07 ccw(c1222.07,1217.07) v1@1213.54,1208.54 ; 1210,1221.47 cw(c1253.53,1221.47) R10.1@1222.75,1252.25 ; 1210,1221.47 cw(c1253.53,1221.47) R10.1@1222.75,1252.25 ; 1210,1221.47 cw(c1253.53,1221.47) R10.1@1222.75,1252.25 ; 1210,1296.47 cw(c1253.53,1296.47) C7.1@1222.75,1327.25 ; 1210,1296.47 cw(c1253.53,1296.47) C7.1@1222.75,1327.25 ; 1210,1296.47 cw(c1253.53,1296.47) C7.1@1222.75,1327.25 ; 1210,1308.53 ccw(c1253.53,1308.53) R10.1@1222.75,1277.75 ; 1210,1308.53 ccw(c1253.53,1308.53) R10.1@1222.75,1277.75 ; 1210,1308.53 ccw(c1253.53,1308.53) R10.1@1222.75,1277.75 ; 1210,1383.53 ccw(c1253.53,1383.53) C7.1@1222.75,1352.75 ; 1210,1383.53 ccw(c1253.53,1383.53) C7.1@1222.75,1352.75 ; 1210,1383.53 ccw(c1253.53,1383.53) C7.1@1222.75,1352.75 ; v1@1213.54,411.46 cw(c1221.5,403.5) 1221.5,414.76 ; v1@1213.54,411.46 cw(c1221.5,403.5) 1221.5,414.76 ; v1@1213.54,411.46 cw(c1221.5,403.5) 1221.5,414.76 ; v1@1213.54,418.54 ccw(c1222.64,427.64) 1222.64,414.76 ; v1@1213.54,418.54 ccw(c1222.64,427.64) 1222.64,414.76 ; v1@1213.54,418.54 ccw(c1222.64,427.64) 1222.64,414.76 ; JP1.7@1611.46,275.16 ccw(c1568.78,317.84) 1629.13,317.84 ; JP1.7@1611.46,275.16 ccw(c1568.78,317.84) 1629.13,317.84 ; JP1.7@1611.46,275.16 ccw(c1568.78,317.84) 1629.13,317.84 ; JP1.7@1611.46,275.16 ccw(c1568.78,317.84) 1629.13,317.84 ; JP1.7@1618.53,268.09 ccw(c1592.92,293.69) 1629.13,293.69 ; JP1.7@1618.53,268.09 ccw(c1592.92,293.69) 1629.13,293.69 ; JP1.7@1618.53,268.09 ccw(c1592.92,293.69) 1629.13,293.69 ; JP1.7@1618.53,268.09 ccw(c1592.92,293.69) 1629.13,293.69 ; 1629.13,293.69 ccw(c1665.35,293.69) JP1.7@1639.74,268.09 ; 1629.13,293.69 ccw(c1665.35,293.69) JP1.7@1639.74,268.09 ; 1629.13,293.69 ccw(c1665.35,293.69) JP1.7@1639.74,268.09 ; 1629.13,293.69 ccw(c1665.35,293.69) JP1.7@1639.74,268.09 ; 1629.13,317.84 ccw(c1689.49,317.84) JP1.7@1646.81,275.16 ; 1629.13,317.84 ccw(c1689.49,317.84) JP1.7@1646.81,275.16 ; 1629.13,317.84 ccw(c1689.49,317.84) JP1.7@1646.81,275.16 ; 1629.13,317.84 ccw(c1689.49,317.84) JP1.7@1646.81,275.16 ; 1963.74,414.76 ccw(c1963.74,427.64) v1@1972.84,418.54 ; 1963.74,414.76 ccw(c1963.74,427.64) v1@1972.84,418.54 ; 1963.74,414.76 ccw(c1963.74,427.64) v1@1972.84,418.54 ; 1964.88,414.76 cw(c1964.88,403.5) v1@1972.84,411.46 ; 1964.88,414.76 cw(c1964.88,403.5) v1@1972.84,411.46 ; 1964.88,414.76 cw(c1964.88,403.5) v1@1972.84,411.46
  BottomLayer w10: v1(1210,415) v1(1210,1205) ; v1@1972.84,1000.4 cw(c1964.31,991.87) 1976.38,991.87 cw(c1988.45,991.87) v1@1979.91,1000.4 ; v1(1976.38,415) v1(1976.38,1003.94) ; v1@1206.46,418.54 ccw(c1197.93,427.07) 1210,427.07 ; v1@1206.46,418.54 ccw(c1197.93,427.07) 1210,427.07 ; v1@1206.46,418.54 ccw(c1197.93,427.07) 1210,427.07 ; v1@1206.46,1201.46 cw(c1197.93,1192.93) 1210,1192.93 ; v1@1206.46,1201.46 cw(c1197.93,1192.93) 1210,1192.93 ; v1@1206.46,1201.46 cw(c1197.93,1192.93) 1210,1192.93 ; 1210,427.07 ccw(c1222.07,427.07) v1@1213.54,418.54 ; 1210,427.07 ccw(c1222.07,427.07) v1@1213.54,418.54 ; 1210,427.07 ccw(c1222.07,427.07) v1@1213.54,418.54 ; 1210,1192.93 cw(c1222.07,1192.93) v1@1213.54,1201.46 ; 1210,1192.93 cw(c1222.07,1192.93) v1@1213.54,1201.46 ; 1210,1192.93 cw(c1222.07,1192.93) v1@1213.54,1201.46 ; v1@1972.84,418.54 ccw(c1964.31,427.07) 1976.38,427.07 ; v1@1972.84,418.54 ccw(c1964.31,427.07) 1976.38,427.07 ; v1@1972.84,418.54 ccw(c1964.31,427.07) 1976.38,427.07 ; 1976.38,427.07 ccw(c1988.45,427.07) v1@1979.91,418.54 ; 1976.38,427.07 ccw(c1988.45,427.07) v1@1979.91,418.54 ; 1976.38,427.07 ccw(c1988.45,427.07) v1@1979.91,418.54
SPI_CSN: U2.7 U3.4 | length 1140.5
  TopLayer w10: U2.7@1649.61,1224.81 1649.61,1303.69 1696.92,1351.01 2473.99,1351.01 2535,1290 2595.43,1290 U3.4@2598.43,1287.01 ; 2535.59,1290 cw(c2535.59,1261.68) U3.4@2555.62,1281.7 ; 2535.59,1290 cw(c2535.59,1261.68) U3.4@2555.62,1281.7 ; 2535.59,1290 cw(c2535.59,1261.68) U3.4@2555.62,1281.7
SPI_EN: U2.5
SPI_MISO: U2.13 U3.11 | length 2521.4
  TopLayer w10: v1(1484.25,1102.36) 1509.64,1127.76 U2.13@1574.72,1127.76 ; v1(1845,725) v1(2120,725) ; v1(2645,905) 2770,905 2852.01,987.01 U3.11@2978.43,987.01 ; v1@1484.25,1107.36 ccw(c1484.25,1119.43) 1492.78,1110.9 ; v1@1484.25,1107.36 ccw(c1484.25,1119.43) 1492.78,1110.9 ; v1@1484.25,1107.36 ccw(c1484.25,1119.43) 1492.78,1110.9 ; v1@1489.25,1102.36 cw(c1501.32,1102.36) 1492.78,1110.9 ; v1@1489.25,1102.36 cw(c1501.32,1102.36) 1492.78,1110.9 ; v1@1489.25,1102.36 cw(c1501.32,1102.36) 1492.78,1110.9 ; v1@1848.54,721.46 cw(c1857.07,712.93) 1857.07,725 ; v1@1848.54,721.46 cw(c1857.07,712.93) 1857.07,725 ; v1@1848.54,721.46 cw(c1857.07,712.93) 1857.07,725 ; v1@1848.54,728.54 ccw(c1857.07,737.07) 1857.07,725 ; v1@1848.54,728.54 ccw(c1857.07,737.07) 1857.07,725 ; v1@1848.54,728.54 ccw(c1857.07,737.07) 1857.07,725 ; 2107.93,725 cw(c2107.93,712.93) v1@2116.46,721.46 ; 2107.93,725 ccw(c2107.93,737.07) v1@2116.46,728.54 ; 2107.93,725 cw(c2107.93,712.93) v1@2116.46,721.46 ; 2107.93,725 ccw(c2107.93,737.07) v1@2116.46,728.54 ; 2107.93,725 cw(c2107.93,712.93) v1@2116.46,721.46 ; 2107.93,725 ccw(c2107.93,737.07) v1@2116.46,728.54 ; v1@2648.54,901.46 cw(c2657.07,892.93) 2657.07,905 ; v1@2648.54,901.46 cw(c2657.07,892.93) 2657.07,905 ; v1@2648.54,901.46 cw(c2657.07,892.93) 2657.07,905 ; v1@2648.54,908.54 ccw(c2657.07,917.07) 2657.07,905 ; v1@2648.54,908.54 ccw(c2657.07,917.07) 2657.07,905 ; v1@2648.54,908.54 ccw(c2657.07,917.07) 2657.07,905 ; 2922.82,987.01 cw(c2922.82,968.9) U3.11@2935.62,981.7 ; 2922.82,987.01 ccw(c2922.82,1005.11) U3.11@2935.62,992.31 ; 2922.82,987.01 cw(c2922.82,968.9) U3.11@2935.62,981.7 ; 2922.82,987.01 ccw(c2922.82,1005.11) U3.11@2935.62,992.31 ; 2922.82,987.01 cw(c2922.82,968.9) U3.11@2935.62,981.7 ; 2922.82,987.01 ccw(c2922.82,1005.11) U3.11@2935.62,992.31
  BottomLayer w10: v1(1484.25,1102.36) 1484.25,895.75 1655,725 v1(1845,725) ; v1(2120,725) 2465,725 v1(2645,905) ; v1@1480.71,1098.83 cw(c1472.18,1090.29) 1484.25,1090.29 ; v1@1480.71,1098.83 cw(c1472.18,1090.29) 1484.25,1090.29 ; v1@1480.71,1098.83 cw(c1472.18,1090.29) 1484.25,1090.29 ; 1484.25,1090.29 cw(c1496.32,1090.29) v1@1487.78,1098.83 ; 1484.25,1090.29 cw(c1496.32,1090.29) v1@1487.78,1098.83 ; 1484.25,1090.29 cw(c1496.32,1090.29) v1@1487.78,1098.83 ; 1832.93,725 cw(c1832.93,712.93) v1@1841.46,721.46 ; 1832.93,725 ccw(c1832.93,737.07) v1@1841.46,728.54 ; 1832.93,725 cw(c1832.93,712.93) v1@1841.46,721.46 ; 1832.93,725 ccw(c1832.93,737.07) v1@1841.46,728.54 ; 1832.93,725 cw(c1832.93,712.93) v1@1841.46,721.46 ; 1832.93,725 ccw(c1832.93,737.07) v1@1841.46,728.54 ; v1@2123.54,721.46 cw(c2132.07,712.93) 2132.07,725 ; v1@2123.54,721.46 cw(c2132.07,712.93) 2132.07,725 ; v1@2123.54,721.46 cw(c2132.07,712.93) 2132.07,725 ; v1@2123.54,728.54 ccw(c2132.07,737.07) 2132.07,725 ; v1@2123.54,728.54 ccw(c2132.07,737.07) 2132.07,725 ; v1@2123.54,728.54 ccw(c2132.07,737.07) 2132.07,725 ; 2636.46,896.46 cw(c2645,887.93) v1@2645,900 ; 2636.46,896.46 ccw(c2627.93,905) v1@2640,905 ; 2636.46,896.46 cw(c2645,887.93) v1@2645,900 ; 2636.46,896.46 ccw(c2627.93,905) v1@2640,905 ; 2636.46,896.46 cw(c2645,887.93) v1@2645,900 ; 2636.46,896.46 ccw(c2627.93,905) v1@2640,905
SPI_MOSI: U2.9 U3.2 | length 1193.7
  TopLayer w10: U2.9@1610.24,1224.81 1610.24,1315.24 1682.01,1387.01 U3.2@2598.43,1387.01 ; 2542.82,1387.01 cw(c2542.82,1368.9) U3.2@2555.62,1381.7 ; 2542.82,1387.01 ccw(c2542.82,1405.11) U3.2@2555.62,1392.31 ; 2542.82,1387.01 cw(c2542.82,1368.9) U3.2@2555.62,1381.7 ; 2542.82,1387.01 ccw(c2542.82,1405.11) U3.2@2555.62,1392.31 ; 2542.82,1387.01 cw(c2542.82,1368.9) U3.2@2555.62,1381.7 ; 2542.82,1387.01 ccw(c2542.82,1405.11) U3.2@2555.62,1392.31
SPI_SCLK: U2.8 U3.3 | length 1176.4
  TopLayer w10: U2.8@1629.92,1224.81 1629.92,1309.47 1689.46,1369.01 2495.99,1369.01 2527.99,1337.01 U3.3@2598.43,1337.01 ; 2542.82,1337.01 cw(c2542.82,1318.9) U3.3@2555.62,1331.7 ; 2542.82,1337.01 ccw(c2542.82,1355.11) U3.3@2555.62,1342.31 ; 2542.82,1337.01 cw(c2542.82,1318.9) U3.3@2555.62,1331.7 ; 2542.82,1337.01 ccw(c2542.82,1355.11) U3.3@2555.62,1342.31 ; 2542.82,1337.01 cw(c2542.82,1318.9) U3.3@2555.62,1331.7 ; 2542.82,1337.01 ccw(c2542.82,1355.11) U3.3@2555.62,1342.31
UART_EN: U2.36
UART_RX: U2.34 U3.12 | length 1531.2
  TopLayer w10: U2.34@1805.72,1147.44 1954.92,1147.44 1992.13,1110.24 v1(2066.93,1110.24) ; v1(2695,1110) 2767.99,1037.01 U3.12@2978.43,1037.01 ; 2054.86,1110.24 cw(c2054.86,1098.17) v1@2063.39,1106.7 ; 2054.86,1110.24 ccw(c2054.86,1122.31) v1@2063.39,1113.77 ; 2054.86,1110.24 cw(c2054.86,1098.17) v1@2063.39,1106.7 ; 2054.86,1110.24 ccw(c2054.86,1122.31) v1@2063.39,1113.77 ; 2054.86,1110.24 cw(c2054.86,1098.17) v1@2063.39,1106.7 ; 2054.86,1110.24 ccw(c2054.86,1122.31) v1@2063.39,1113.77 ; v1@2695,1105 cw(c2695,1092.93) 2703.54,1101.46 ; v1@2695,1105 cw(c2695,1092.93) 2703.54,1101.46 ; v1@2695,1105 cw(c2695,1092.93) 2703.54,1101.46 ; v1@2700,1110 ccw(c2712.07,1110) 2703.54,1101.46 ; v1@2700,1110 ccw(c2712.07,1110) 2703.54,1101.46 ; v1@2700,1110 ccw(c2712.07,1110) 2703.54,1101.46 ; 2922.82,1037.01 cw(c2922.82,1018.9) U3.12@2935.62,1031.7 ; 2922.82,1037.01 ccw(c2922.82,1055.11) U3.12@2935.62,1042.31 ; 2922.82,1037.01 cw(c2922.82,1018.9) U3.12@2935.62,1031.7 ; 2922.82,1037.01 ccw(c2922.82,1055.11) U3.12@2935.62,1042.31 ; 2922.82,1037.01 cw(c2922.82,1018.9) U3.12@2935.62,1031.7 ; 2922.82,1037.01 ccw(c2922.82,1055.11) U3.12@2935.62,1042.31
  BottomLayer w10: v1(2066.93,1110.24) v1@2695,1110.24 ; v1@2070.46,1106.7 cw(c2079,1098.17) 2079,1110.24 ; v1@2070.46,1106.7 cw(c2079,1098.17) 2079,1110.24 ; v1@2070.46,1106.7 cw(c2079,1098.17) 2079,1110.24 ; v1@2070.46,1113.77 ccw(c2079,1122.31) 2079,1110.24 ; v1@2070.46,1113.77 ccw(c2079,1122.31) 2079,1110.24 ; v1@2070.46,1113.77 ccw(c2079,1122.31) 2079,1110.24 ; 2682.36,1110.24 cw(c2682.36,1097.36) v1@2691.46,1106.46 ; 2682.36,1110.24 cw(c2682.36,1097.36) v1@2691.46,1106.46 ; 2682.36,1110.24 cw(c2682.36,1097.36) v1@2691.46,1106.46 ; 2683.5,1110.24 ccw(c2683.5,1121.5) v1@2691.46,1113.54 ; 2683.5,1110.24 ccw(c2683.5,1121.5) v1@2691.46,1113.54 ; 2683.5,1110.24 ccw(c2683.5,1121.5) v1@2691.46,1113.54
UART_TX: U2.35 U3.7 | length 912.9
  TopLayer w10: U2.35@1805.72,1167.13 2102.87,1167.13 2160,1110 2405,1110 2432.01,1137.01 U3.7@2598.43,1137.01 ; 2542.82,1137.01 cw(c2542.82,1118.9) U3.7@2555.62,1131.7 ; 2542.82,1137.01 ccw(c2542.82,1155.11) U3.7@2555.62,1142.31 ; 2542.82,1137.01 cw(c2542.82,1118.9) U3.7@2555.62,1131.7 ; 2542.82,1137.01 ccw(c2542.82,1155.11) U3.7@2555.62,1142.31 ; 2542.82,1137.01 cw(c2542.82,1118.9) U3.7@2555.62,1131.7 ; 2542.82,1137.01 ccw(c2542.82,1155.11) U3.7@2555.62,1142.31
USB_IFC_CTRL: R6.2 TP1.1 U2.4 | length 1839.2
  TopLayer w10: TP1.1@615.68,1344.43 cw(c581.3,1310.04) 629.92,1310.04 ; v1@626.39,1294.87 ccw(c617.85,1303.41) 629.92,1303.41 ccw(c641.99,1303.41) v1@633.46,1294.87 ; R6.2@629.61,1192.29 629.92,1192.61 v1(629.92,1291.34) 629.92,1358.47 TP1.1@629.82,1358.57 ; 629.92,1310.52 cw(c677.86,1310.52) TP1.1@643.96,1344.43 ; U2.4@1708.66,1224.81 v1(1708.66,1291.34) ; R6.2@616.86,1207.01 ccw(c585.31,1238.55) 629.92,1238.55 ; R6.2@616.86,1207.01 ccw(c585.31,1238.55) 629.92,1238.55 ; R6.2@616.86,1207.01 ccw(c585.31,1238.55) 629.92,1238.55 ; v1@626.39,1287.8 cw(c617.85,1279.27) 629.92,1279.27 ; v1@626.39,1287.8 cw(c617.85,1279.27) 629.92,1279.27 ; v1@626.39,1287.8 cw(c617.85,1279.27) 629.92,1279.27 ; 629.92,1237.03 ccw(c672.38,1237.03) R6.2@642.36,1207.01 ; 629.92,1237.03 ccw(c672.38,1237.03) R6.2@642.36,1207.01 ; 629.92,1237.03 ccw(c672.38,1237.03) R6.2@642.36,1207.01 ; 629.92,1279.27 cw(c641.99,1279.27) v1@633.46,1287.8 ; 629.92,1279.27 cw(c641.99,1279.27) v1@633.46,1287.8 ; 629.92,1279.27 cw(c641.99,1279.27) v1@633.46,1287.8 ; v1@1705.13,1287.8 cw(c1696.59,1279.27) 1708.66,1279.27 ; v1@1705.13,1287.8 cw(c1696.59,1279.27) 1708.66,1279.27 ; v1@1705.13,1287.8 cw(c1696.59,1279.27) 1708.66,1279.27 ; 1708.66,1279.27 cw(c1720.73,1279.27) v1@1712.2,1287.8 ; 1708.66,1279.27 cw(c1720.73,1279.27) v1@1712.2,1287.8 ; 1708.66,1279.27 cw(c1720.73,1279.27) v1@1712.2,1287.8
  BottomLayer w10: v1(629.92,1291.34) v1(1708.66,1291.34) ; v1@633.46,1287.8 cw(c641.99,1279.27) 641.99,1291.34 ; v1@633.46,1287.8 cw(c641.99,1279.27) 641.99,1291.34 ; v1@633.46,1287.8 cw(c641.99,1279.27) 641.99,1291.34 ; v1@633.46,1294.87 ccw(c641.99,1303.41) 641.99,1291.34 ; v1@633.46,1294.87 ccw(c641.99,1303.41) 641.99,1291.34 ; v1@633.46,1294.87 ccw(c641.99,1303.41) 641.99,1291.34 ; 1696.59,1291.34 cw(c1696.59,1279.27) v1@1705.13,1287.8 ; 1696.59,1291.34 ccw(c1696.59,1303.41) v1@1705.13,1294.87 ; 1696.59,1291.34 cw(c1696.59,1279.27) v1@1705.13,1287.8 ; 1696.59,1291.34 ccw(c1696.59,1303.41) v1@1705.13,1294.87 ; 1696.59,1291.34 cw(c1696.59,1279.27) v1@1705.13,1287.8 ; 1696.59,1291.34 ccw(c1696.59,1303.41) v1@1705.13,1294.87
VBUS: C8.1 C9.1 CN1.VBUS U4.3 | length 1238.6
  TopLayer w30: CN1.VBUS@452.53,818.89 562.76,708.66 ; C8.1@629.92,708.66 562.76,708.66 ; U4.3@827.77,372.18 737.82,372.18 716.72,393.28 C9.1@649.13,393.28 596.72,393.28 562.76,427.24 562.76,708.66 ; CN1.VBUS@470.99,818.89 ccw(c515.57,818.89) 484.05,787.37 ; CN1.VBUS@470.99,818.89 ccw(c515.57,818.89) 484.05,787.37 ; CN1.VBUS@470.99,818.89 ccw(c515.57,818.89) 484.05,787.37 ; 612.91,393.28 cw(c612.91,357.06) C9.1@638.52,382.67 ; 612.91,393.28 ccw(c612.91,429.49) C9.1@638.52,403.88 ; 612.91,393.28 cw(c612.91,357.06) C9.1@638.52,382.67 ; 612.91,393.28 ccw(c612.91,429.49) C9.1@638.52,403.88 ; 612.91,393.28 cw(c612.91,357.06) C9.1@638.52,382.67 ; 612.91,393.28 ccw(c612.91,429.49) C9.1@638.52,403.88 ; C9.1@659.73,382.67 cw(c685.34,357.06) 685.34,393.28 ; C9.1@659.73,382.67 cw(c685.34,357.06) 685.34,393.28 ; C9.1@659.73,382.67 cw(c685.34,357.06) 685.34,393.28 ; C9.1@659.73,403.88 ccw(c685.34,429.49) 685.34,393.28 ; C9.1@659.73,403.88 ccw(c685.34,429.49) 685.34,393.28 ; C9.1@659.73,403.88 ccw(c685.34,429.49) 685.34,393.28
pads on no net: JP1.5 JP1.6 JP1.8 JP1.9 JP1.10 O1.0 O2.0 O3.0 O4.0 S1.3 S1.4 U2.14 U2.23 U2.24 U4.4 Y1.2 Y1.4
copper on no net: | length 3.9
  BottomLayer w10: 141.73,-2007.87 145.67,-2007.87

## Polygon pours and split planes (outlines as drawn)
GND on TopLayer "TopLayer-GND" (solid, remove dead copper, pour order 1000): 0,1732.28 0,0 3740.16,0 3740.16,1732.28
GND on BottomLayer "BottomLayer-GND" (solid, remove dead copper, pour order 1001): 0,1732.28 0,0 3740.16,0 3740.16,1732.28

## Keep-outs
KeepOutLayer:
  lines w10: 0,0 3740.16,0 3740.16,1732.28 0,1732.28 0,0

## Other copper
BottomLayer:
  rectangle net GND: 1585,1005 1795,1210

## Silkscreen, mask and mechanical layers (free items; w line width, h text height)
TopOverlay:
  drawing of 773 lines, arcs and shapes, not listed
  text "CC Debugger S2530" at 1280,1555 h78.74
  text "V1.02 2009.12.16 11:40" at 2260,69 h39.37

## Text inside footprints (layer, text, board x,y; h text height)
JP2: TopOverlay "2" at 3527.88,1192.83 h30 r270; TopOverlay "1" at 3414.88,1191.83 h30 r270